# EAGLE board Datalogger (EAGLE 9.6.2)
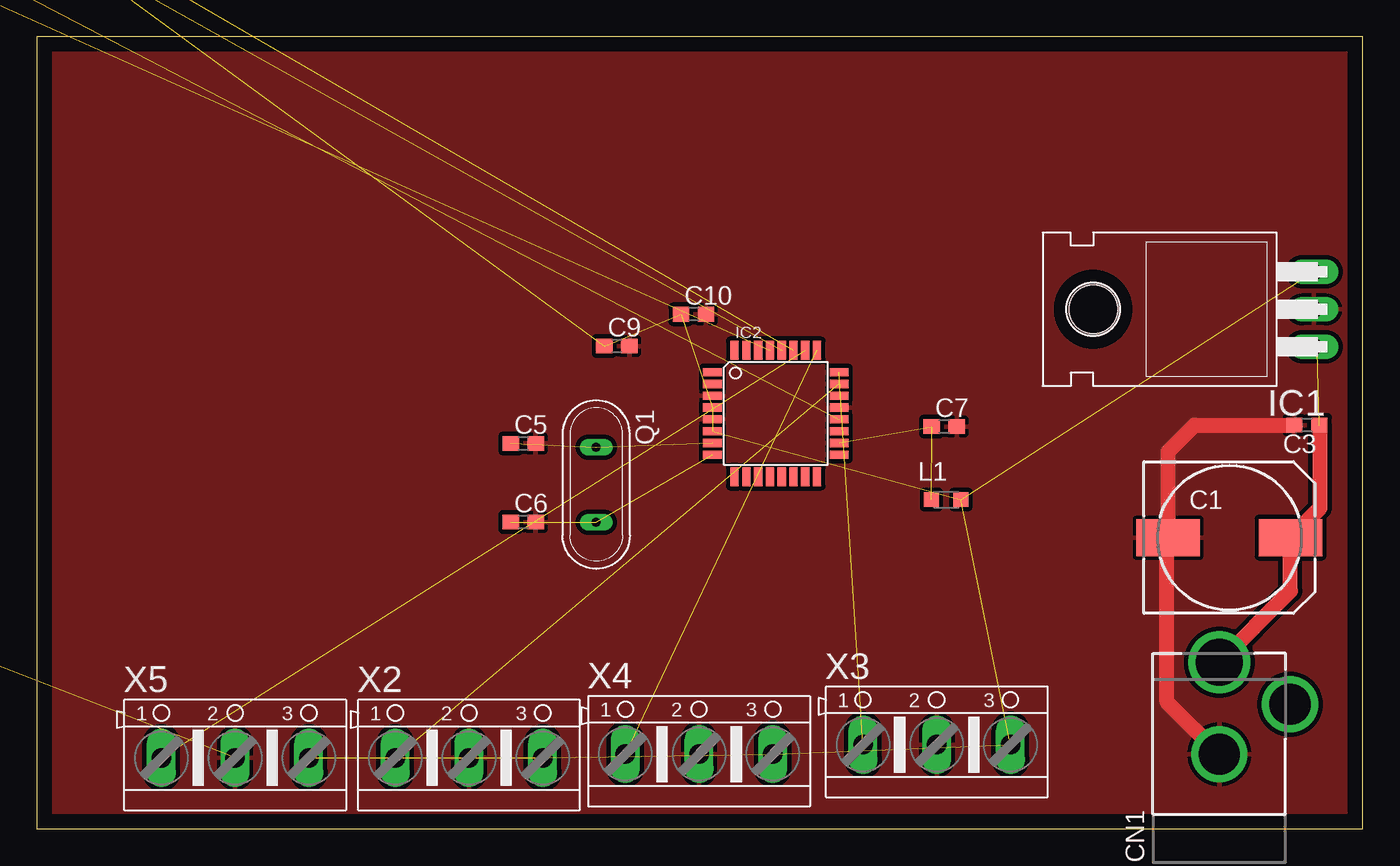
[diagram p0: board, top side]

Size 90 x 53.75 mm. Coordinates in mm from the lower left corner, seen from the top.
Outline: 0,0 90,0 90,53.75 0,53.75 0,0
Copper layers (1*16): Top 0.035mm / dielectric 1.5mm / Bottom 0.035mm
Design rules "default": minimum track width 6mil, minimum drill 0.35mm, track to track 6mil, track to pad 6mil, pad to pad 6mil, via to via 6mil, smd to smd 6mil, copper to edge 40mil, drill to drill 6mil, minimum pad ring 10mil, minimum via ring 8mil, stop-mask expansion 4mil, vias tented up to drill 0mil, thermal gap 10mil

## Footprints (pad centres in the part's own frame; a part is rotated, then mirrored left to right if it is on the bottom)
BATTERY_1236_C = drill 1.27 pad 2.032: + 0,0; - 0,20.32
140CLH-1010 = smd 4.3 x 2.5: + 4.15,0; - -4.15,0
C0603 = smd 1.1 x 1: 1 -0.85,0; 2 0.85,0
DCJACK_2MM_PTH = drill 2.8: GND 0,7.35; GNDBREAK 4.8,10.75 | drill 3.2: PWR 0,13.6
TO220H = drill 1.118 long: 1 -2.54,-10.16; 2 0,-10.16; 3 2.54,-10.16 | hole 3.302: 0,4.826
TQFP32-08 = smd 1.27 x 0.559: 1 -4.293,2.8; 2 -4.293,2; 3 -4.293,1.2; 4 -4.293,0.4; 5 -4.293,-0.4; 6 -4.293,-1.2; 7 -4.293,-2; 8 -4.293,-2.8; 17 4.293,-2.8; 18 4.293,-2; 19 4.293,-1.2; 20 4.293,-0.4; 21 4.293,0.4; 22 4.293,1.2; 23 4.293,2; 24 4.293,2.8 | smd 0.559 x 1.27: 9 -2.8,-4.293; 10 -2,-4.293; 11 -1.2,-4.293; 12 -0.4,-4.293; 13 0.4,-4.293; 14 1.2,-4.293; 15 2,-4.293; 16 2.8,-4.293; 25 2.8,4.293; 26 2,4.293; 27 1.2,4.293; 28 0.4,4.293; 29 -0.4,4.293; 30 -1.2,4.293; 31 -2,4.293; 32 -2.8,4.293
L2012C = smd 1 x 1: 1 -1,0; 2 1,0
QS = drill 0.61 long: 1 -2.54,0; 2 2.54,0
R0603 = smd 1 x 1.1: 1 -0.85,0; 2 0.85,0
SO08-0.15 = smd 0.6 x 1.2: 1 -1.905,-2.8; 2 -0.635,-2.8; 3 0.635,-2.8; 4 1.905,-2.8; 5 1.905,2.8; 6 0.635,2.8; 7 -0.635,2.8; 8 -1.905,2.8
XTAL3215 = smd 1.1 x 1.9: P$1 1.2,0; P$2 -1.2,0
AK500/3 = drill 1.321 long: 1 -5.004,0; 2 0,0; 3 5.004,0

## Placement (x,y rotation side)
BAT1  BATTERY_1236_C  [BATTERY_1236_C]  -33.02,2.54 0 top  (outside the outline)
C1  100u  [140CLH-1010]  80.95,19.77 0 top
C2  100u  [140CLH-1010]  -34.29,63.5 0 top  (outside the outline)
C3  0.1  [C0603]  86.21,27.4 180 top
C4  0.1u  [C0603]  -24.13,76.2 0 top  (outside the outline)
C5  22p  [C0603]  33.02,26.16 0 top
C6  22p  [C0603]  33.02,20.83 0 top
C7  0.1u  [C0603]  61.59,27.3 0 top
C8  0.1u  [C0603]  -39.37,76.2 0 top  (outside the outline)
C9  0.01u  [C0603]  39.37,32.77 0 top
C10  0.1u  [C0603]  44.58,34.92 0 top
C11  100nF  [C0603]  -29.21,72.39 0 top  (outside the outline)
C12  100nF  [C0603]  -36.83,72.39 0 top  (outside the outline)
C13  100nF  [C0603]  -44.45,72.39 0 top  (outside the outline)
C14  100nF  [C0603]  -52.07,72.39 0 top  (outside the outline)
C15  100nF  [C0603]  -59.69,72.39 0 top  (outside the outline)
CN1  [DCJACK_2MM_PTH]  80.26,-2.29 0 top
IC1  7805T  [TO220H]  76.54,35.26 90 top
IC2  MEGA8-AI  [TQFP32-08]  50.16,28.19 0 top
L1  100m  [L2012C]  61.72,22.35 0 top
Q1  16M  [QS]  37.97,23.37 270 top
R1  10k  [R0603]  -46.99,76.2 0 top  (outside the outline)
R2  2.2k  [R0603]  -16.51,72.39 0 top  (outside the outline)
R3  2.2k  [R0603]  -21.59,72.39 0 top  (outside the outline)
U1  DS1307Z  [SO08-0.15]  -44.45,62.23 0 top  (outside the outline)
X1  32.768KHZ  [XTAL3215]  -66.04,60.96 0 top  (outside the outline)
X2  [AK500/3]  29.34,4.83 0 top
X3  [AK500/3]  61.09,5.71 0 top
X4  [AK500/3]  44.96,5.08 0 top
X5  [AK500/3]  13.46,4.83 0 top

## Library data of the parts
BAT1 = Itead_BP_110825.lbr
C1-C15 = rcl; SPICEPREFIX: C
CN1 R2 R3 X1 = adafruit
IC1 = linear
IC2 = atmel; MPN: ATMEGA8-16AU; OC_FARNELL: 9171371; OC_NEWARK: 73M8863
L1 = rcl; SPICEPREFIX: L
Q1 = special
R1 = rcl; SPICEPREFIX: R
U1 = SparkFun-Clocks; PROD_ID: IC-08138
X2-X5 = con-ptr500; OC_FARNELL: unknown; OC_NEWARK: unknown

## Nets
A0: IC2.23 X2.1
A1: IC2.24 X3.1
A2: IC2.25 X4.1
A3: IC2.26 X5.1
GND: BAT1.- C1.- C2.- C3.2 C4.2 C5.2 C6.2 C7.2 C8.1 C9.2 C10.2 C11.1 C12.1 C13.1 C14.1 C15.1 CN1.GND IC1.2 IC2.3 IC2.5 IC2.21 U1.4 X2.2 X3.2 X4.2 X5.2
GNDBREAK: CN1.GNDBREAK
N$1: C1.+ C3.1 CN1.PWR IC1.1
N$2: IC2.29 R1.1
N$3: C6.1 IC2.8 Q1.2
N$4: C5.1 IC2.7 Q1.1
N$5: C7.1 IC2.18 L1.1
N$7: C8.2 IC2.20
N$8: BAT1.+ U1.3
N$9: U1.1 X1.P$2
N$10: U1.2 X1.P$1
SCL: IC2.28 R3.2 U1.6
SDA: IC2.27 R2.1 U1.5
SQW: U1.7
VCC: C2.+ C4.1 C9.1 C10.1 C11.2 C12.2 C13.2 C14.2 C15.2 IC1.3 IC2.4 IC2.6 L1.2 R1.2 R2.2 R3.1 U1.8 X2.3 X3.3 X4.3 X5.3

## Tracks (layer width: path | path; a pad name or v marks a point on that pad's centre or on a via)
A0  (1 unrouted)
A1  (1 unrouted)
A2  (1 unrouted)
A3  (1 unrouted)
GND  (10 unrouted)
  Top 0.61: 76.72,19.68 C1.-
  Top 1.016: CN1.GND 76.72,8.61 76.72,19.68 | C1.- 76.8,25.62 78.58,27.4 C3.2
  pour Top (isolate 0.305): 0,53.59 90.04,53.59 90.04,0.13 0,0.13
N$1  (1 unrouted)
  Top 0.152: C1.+ 85.1,19.81 | 87.12,27.34 C3.1
  Top 0.61: 86.93,32.49 IC1.1
  Top 1.016: CN1.PWR 85.1,16.15 85.1,19.81 | C1.+ 87.12,21.79 87.12,27.34
N$2  (1 unrouted)
N$3  (2 unrouted)
N$4  (2 unrouted)
N$5  (2 unrouted)
N$7  (1 unrouted)
N$8  (1 unrouted)
N$9  (1 unrouted)
N$10  (1 unrouted)
SCL  (2 unrouted)
SDA  (2 unrouted)
VCC  (20 unrouted)